# Altium PCB BOB.PcbDoc
Units mil, origin at the board's own origin, x right, y up, seen from the top; angles counter-clockwise.
Board outline 6000 x 4000 mil, 2 copper layers (Top Layer, Bottom Layer); 4 components, 10 nets, 32 pads, 0 vias.
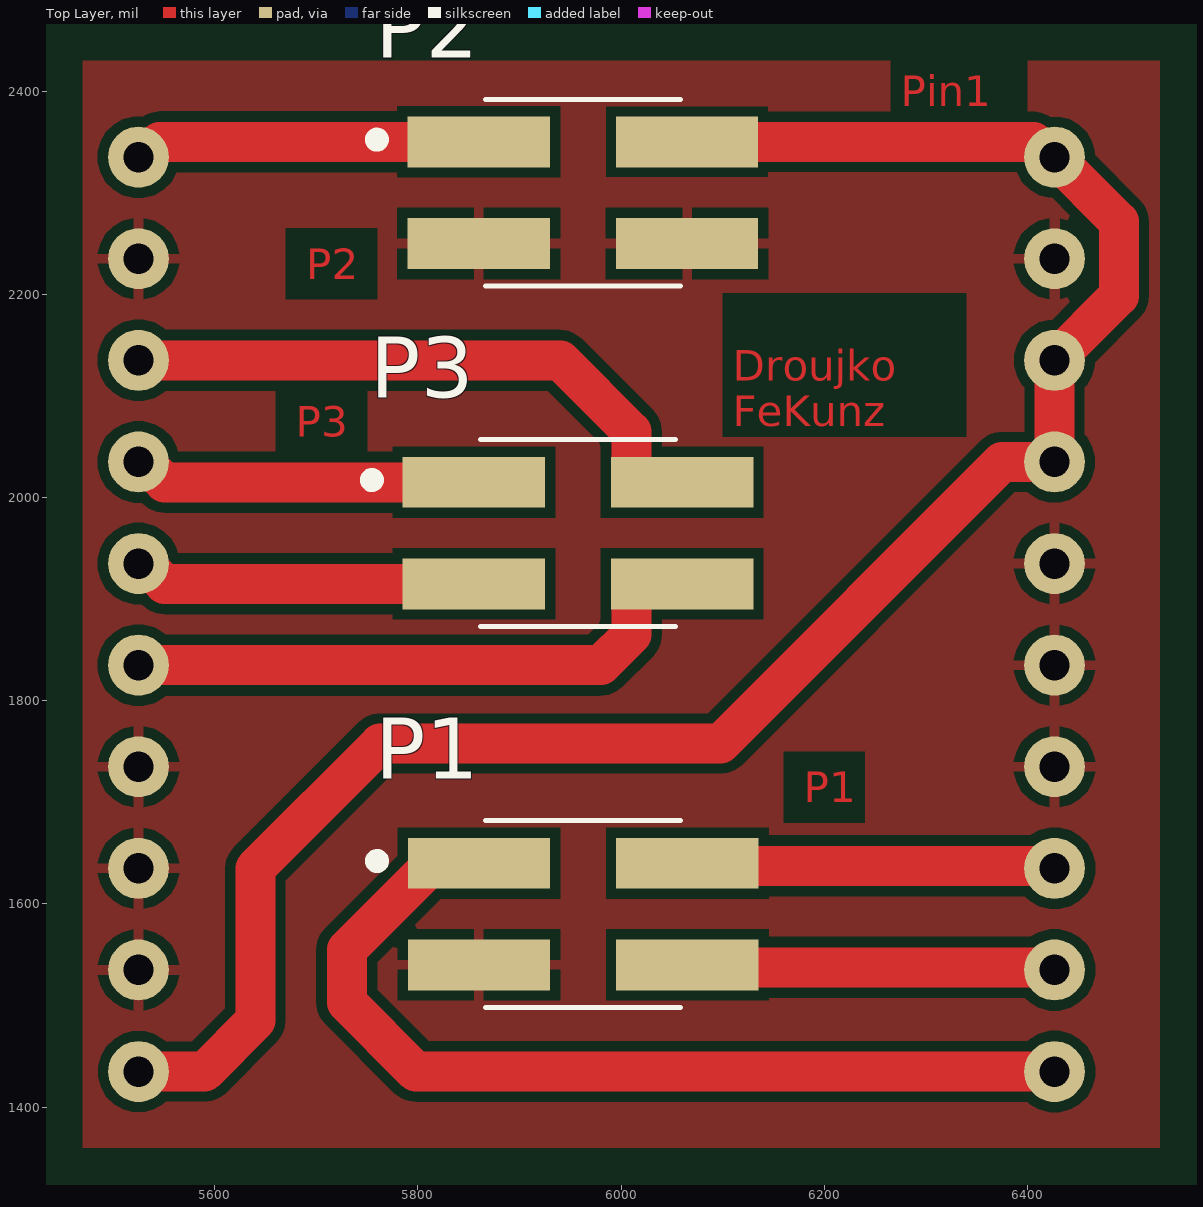
[diagram p0: Top Layer view]
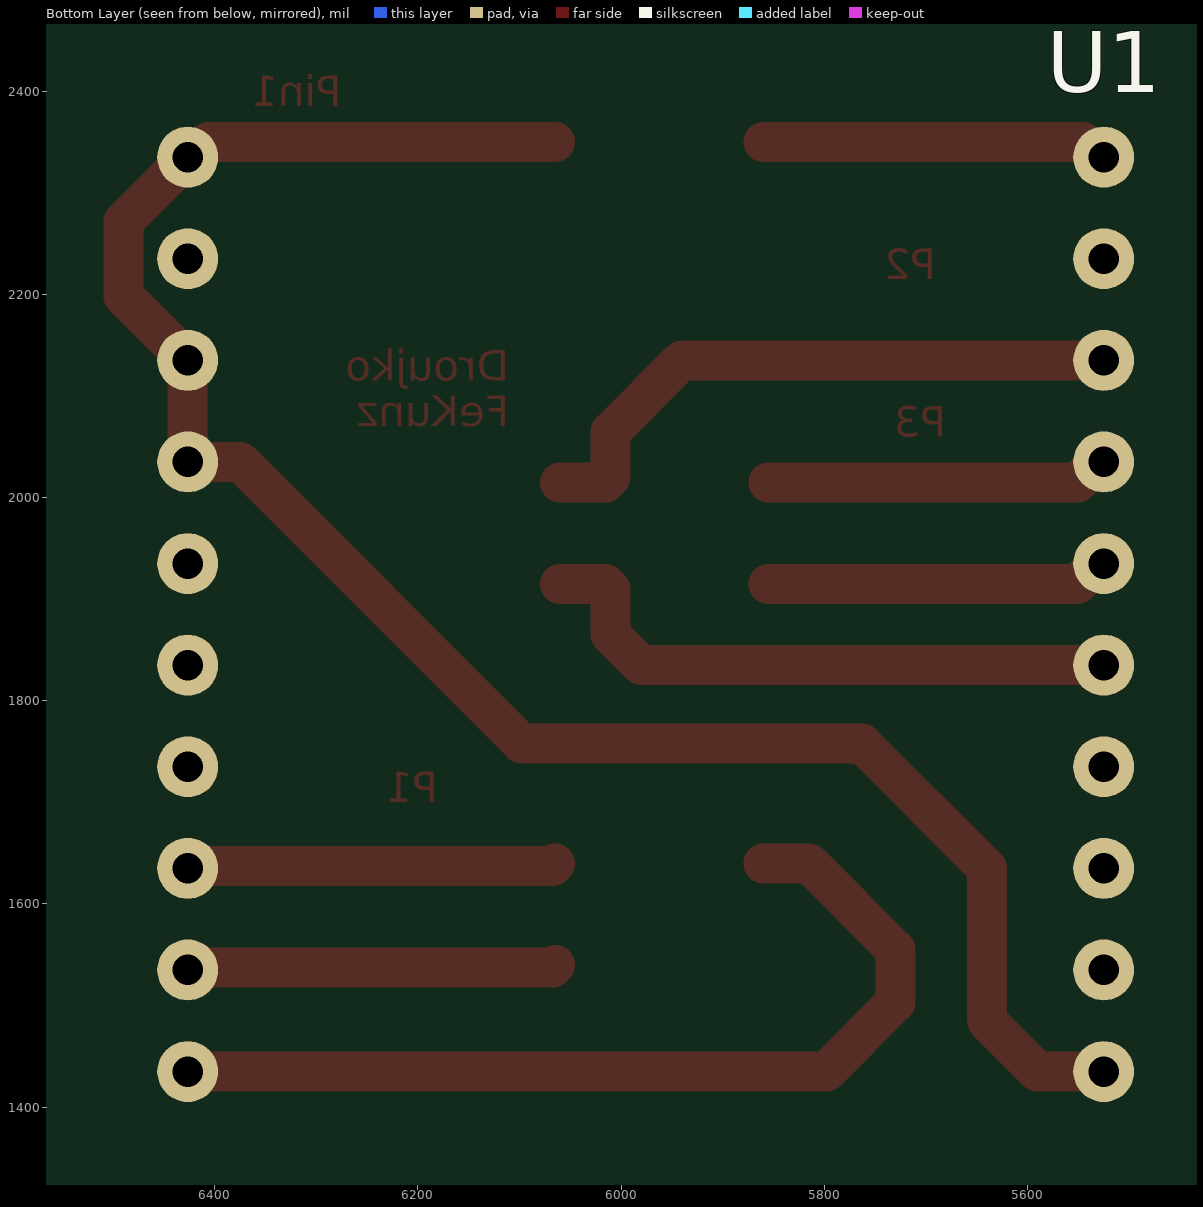
[diagram p1: Bottom Layer view, seen from below]
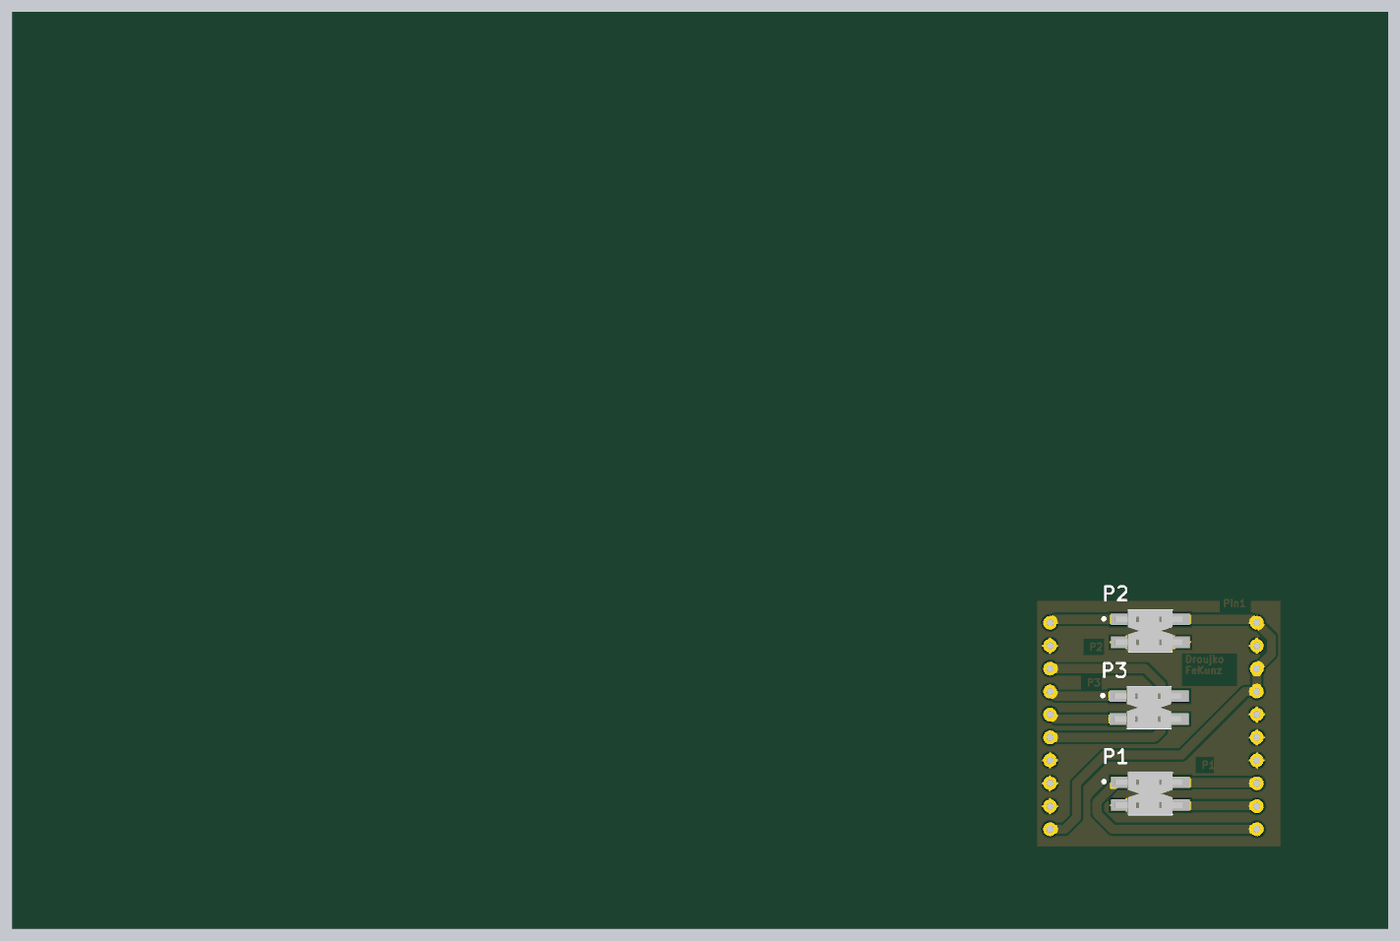
[diagram p2: 3D render of the assembled board from above, using the file's embedded part models]

## Layer stack, top to bottom
Top Solder: solder mask 0.4, Solder Resist, Dk 3.5
Top Layer: signal copper 1.4
Dielectric 1: dielectric 12.6, FR-4, Dk 4.8
Bottom Layer: signal copper 1.4
Bottom Solder: solder mask 0.4, Solder Resist, Dk 3.5

## Board outline
1000,1000 7000,1000 7000,5000 1000,5000

## Design rules (kind name [scope] priority, off if disabled: settings)
Clearance [All] p1: gap=10 ignorepadtopadclearanceinfootprint=FALSE except(0: Arc-Hole Track-Hole SMDPad-Hole THPad-Hole Via-Hole Fill-Hole Poly-Hole Region-Hole Text-Hole)
PolygonConnect [All] p1: connectstyle=Relief reliefconductorwidth=10 reliefentries=4 polygonreliefangle="90 Angle" airgapwidth=10
RoutingVias [All] p1: holewidth=28 width=50 viastyle="Through Hole" minholewidth=28 minwidth=50 maxholewidth=28 maxwidth=50
SolderMaskExpansion [All] p1: expansion=4 istentingtop=FALSE
Width [All] p1: maxlimit=393.7 minlimit=10 preferedwidth=10
30 further rules are at their usual default settings.

## Components (designator, comment, footprint, x,y, rotation, side; value= is the part's Value field where it differs from the comment)
P1 "Component_2" Connector 5960,1590 r0 top
P2 "Component_2" Connector 5959.88,2300 r0 top
P3 "Component_2" Connector 5955,1965 r0 top
U1 "Component_1" BOB 6426.57,1435 r180 bottom

## Footprints (in the part's own frame and the unit in brackets; to place one, negate y for a bottom-side part, rotate by r counter-clockwise, add the part's x,y. Pads: shape width x height; smd on the part's side, far side on the other; paste and mask are expansions set on the pad)
BOB [mil]
  round 60 hole 30: 1(0,900) 2(0,800) 3(0,700) 4(0,600) 5(0,500) 6(0,400) 7(0,300) 8(0,200) 9(0,100) 10(0,0) 11(901.57,900) 12(901.57,800) 13(901.57,700) 14(901.57,600) 15(901.57,500) 16(901.57,400) 17(901.57,300) 18(901.57,200) 19(901.57,100) 20(901.57,0)
Connector [mm]
  rect 3.555x1.27 smd: 1(-2.54,1.27) 2(2.67,1.27) 3(-2.54,-1.27) 4(2.67,-1.27)
  silkscreen extent -5.24,-2.33 2.51,2.33, body extent -3.84,-2.34 4.07,2.34, height 9.84

## Nets (pads, with @x,y where several pads share a name; then routed paths per layer and width w, separated by ;. In a path a pad name is that pad's centre, name@x,y a point inside that pad or via, vN(x,y) a via of type N, cw(c..) or ccw(c..) an arc to the next point about the centre after c; other vN are vias at no path point)
DIR: P1.4 U1.9 | length 363.5
  Top Layer w39.37: P1.4 6067.62,1537.5 6424.07,1537.5 U1.9
EN: P1.2 U1.8 | length 363.5
  Top Layer w39.37: P1.2 6067.62,1637.5 6424.07,1637.5 U1.8
GND: P1.3 P2.3 P2.4 U1.2 U1.5 U1.6 U1.7 U1.12 U1.17 U1.18 U1.19
OA1: P3.1 U1.14 | length 338.3
  Top Layer w39.37: U1.14 5530.58,2035 5550.58,2015 P3.1
OA2: P3.2 U1.13 | length 610.9
  Top Layer w39.37: U1.13 5940.12,2135 6010.24,2064.88 6010.24,2020.31 6015.55,2015 P3.2
OB1: P3.3 U1.15 | length 338.3
  Top Layer w39.37: U1.15 5530.58,1935 5550.58,1915 P3.3
OB2: P3.4 U1.16 | length 594.4
  Top Layer w39.37: U1.16 5980.12,1835 6010.24,1865.12 6010.24,1909.69 6015.55,1915 P3.4
STEP: P1.1 U1.10 | length 941.9
  Top Layer w39.37: P1.1 5815.02,1640 5730,1554.98 5730,1503.06 5798.06,1435 U1.10
V_PIN: P2.2 U1.1 U1.3 U1.4 U1.20 | length 1937.1
  Top Layer w39.37: U1.20 5590,1435 5640,1485 5640,1635 5762.88,1757.88 6097.88,1757.88 6375,2035 U1.4 U1.3@6426.57,2140.58 ; P2.2 U1.1@6405.99,2350 ; U1.3 6490,2198.43 6490,2271.57 U1.1
VBAT: P2.1 U1.11 | length 341.1
  Top Layer w39.37: U1.11 5530.58,2335 5545.58,2350 P2.1

## Polygon pours and split planes (outlines as drawn)
GND on Top Layer "GND_L01_P000" (solid, pour order 0): 5470,2430 5470,1360 6530,1360 6530,2430

## Other copper
Top Layer:
  text "Pin1" at 6275,2385 h30
  text "P2" at 5690,2215 h30
  text "Droujko / FeKunz" at 6110,2070 h30
  text "P3" at 5680,2060 h30
  text "P1" at 6180,1700 h30